# Altium PCB drive.PcbDoc
Units mm, origin at the board's own origin, x right, y up, seen from the top; angles counter-clockwise.
Board outline 29.7 x 29.02 mm, 2 copper layers (Top Layer, Bottom Layer); 60 components, 49 nets, 255 pads, 111 vias.
Unrouted connection lines stored in the file: 5.
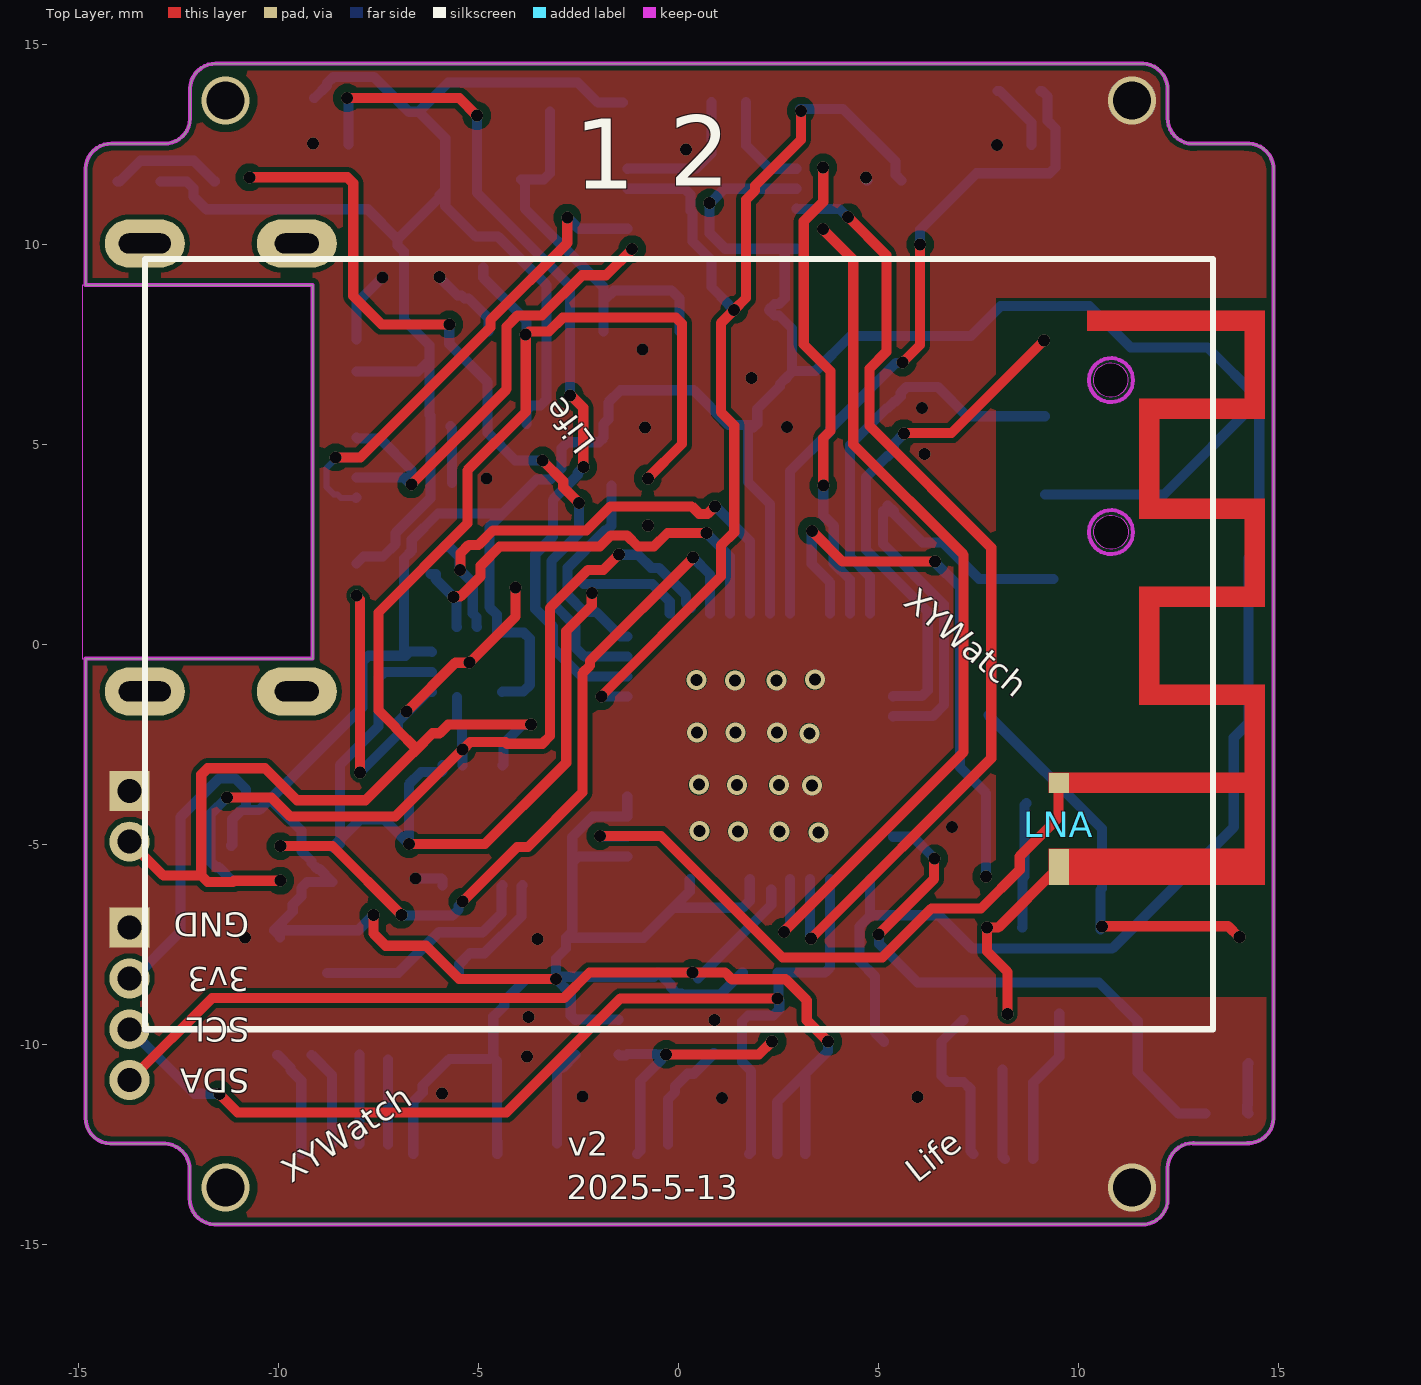
[diagram p0: Top Layer view]
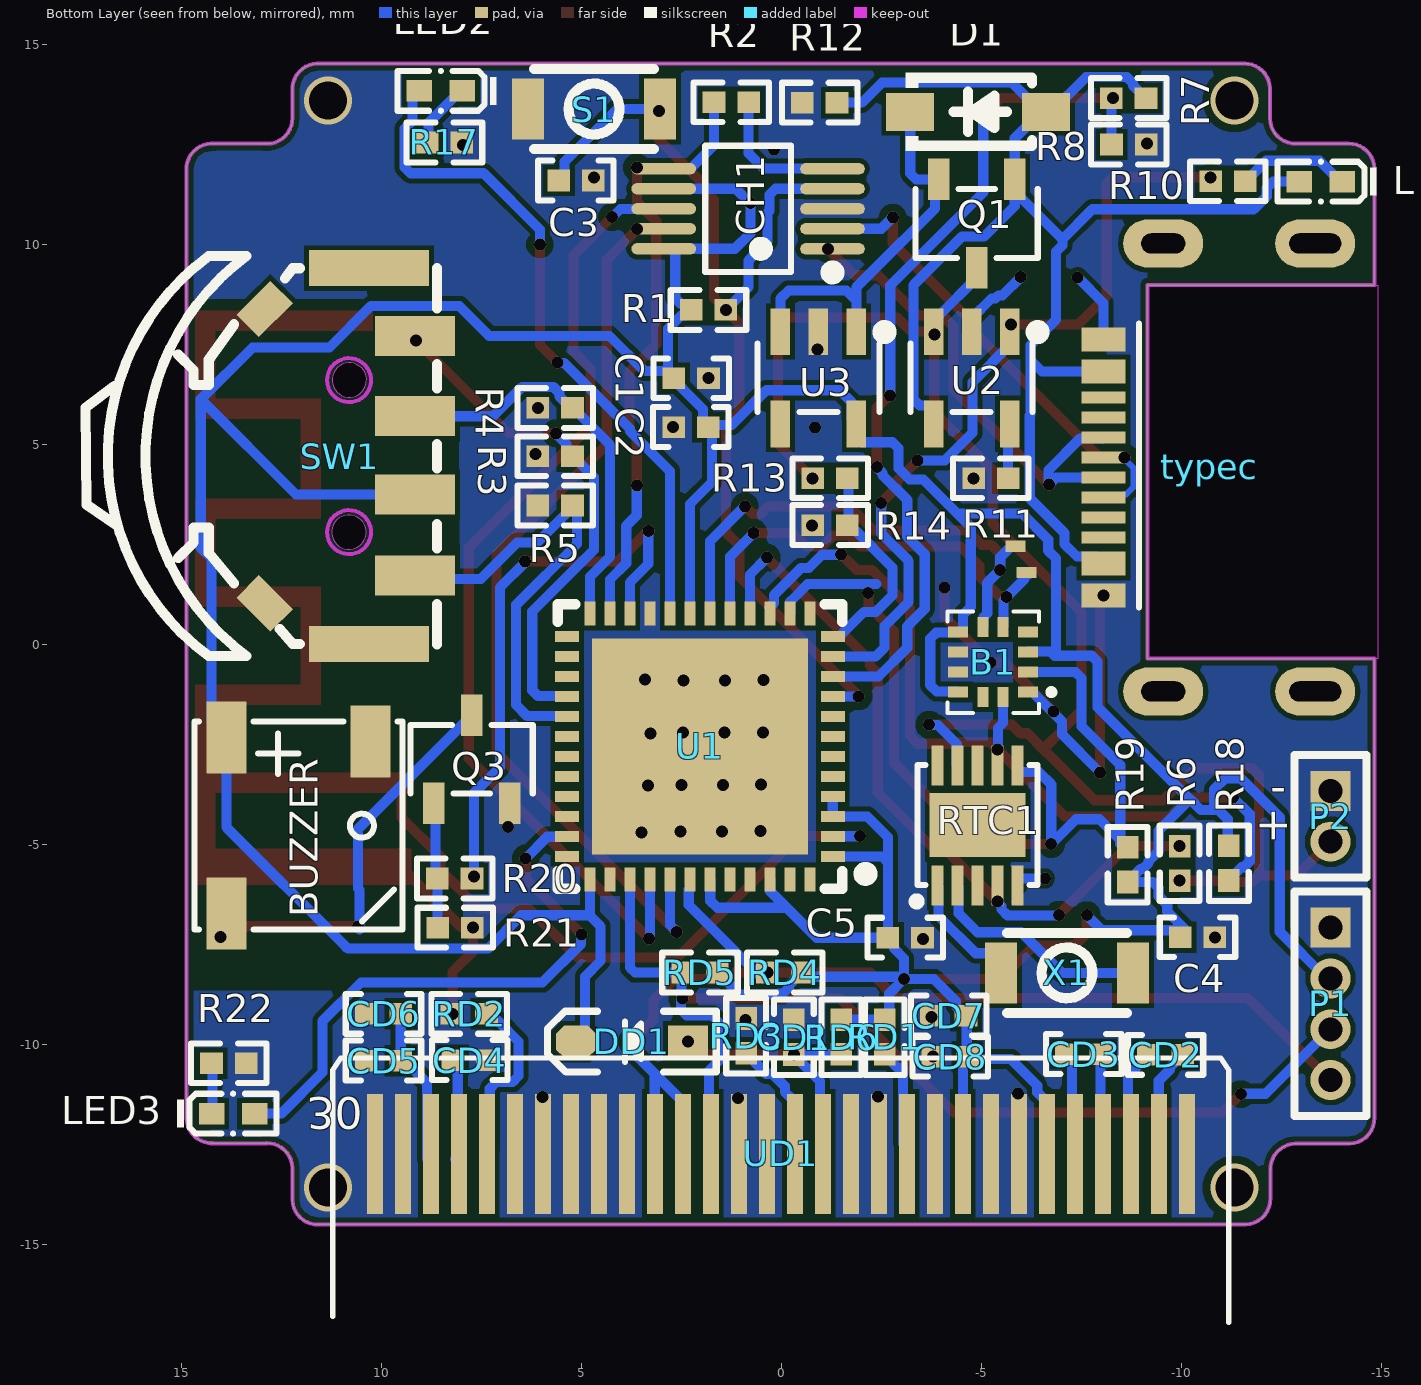
[diagram p1: Bottom Layer view, seen from below]

## Layer stack, top to bottom
Top Solder: solder mask 0.0102, Solder Resist, Dk 3.5
Top Layer: signal copper 0.0356
Dielectric 1: dielectric 0.32, FR-4, Dk 4.8
Bottom Layer: signal copper 0.0356
Bottom Solder: solder mask 0.0102, Solder Resist, Dk 3.5

## Board outline
-14.209,-12.491 -12.87,-12.49 -12.852,-12.492 cw(c-12.867,-13.127) -12.232,-13.142 -12.23,-13.13 -12.23,-13.89 -12.23,-13.859 ccw(c-11.595,-13.874) -11.61,-14.509 -11.61,-14.51 11.58,-14.51 11.571,-14.512 ccw(c11.586,-13.877) 12.221,-13.892 12.22,-13.87 12.22,-13.114 12.218,-13.098 cw(c12.853,-13.113) 12.868,-12.478 12.854,-12.48 14.253,-12.48 14.217,-12.478 ccw(c14.232,-11.843) 14.867,-11.858 14.869,-11.865 14.869,11.891 14.869,11.859 ccw(c14.234,11.874) 14.249,12.509 14.249,12.51 12.84,12.51 12.841,12.508 cw(c12.856,13.143) 12.221,13.158 12.22,13.13 12.22,13.88 12.219,13.859 ccw(c11.584,13.874) 11.599,14.509 11.59,14.51 -11.57,14.51 ccw(c-11.585,13.875) -12.22,13.89 -12.22,13.147 -12.219,13.132 cw(c-12.854,13.147) -12.869,12.512 -12.857,12.51 -14.18,12.51 ccw(c-14.195,11.875) -14.83,11.89 -14.829,11.861 -14.829,8.975 -9.155,8.975 -9.155,-0.365 -14.83,-0.365 -14.83,-11.848 -14.829,-11.841 ccw(c-14.194,-11.856)
cut-out: -14.913,8.975 -14.913,-0.365 -9.189,-0.365 -9.189,8.975

## Design rules (kind name [scope] priority, off if disabled: settings)
Clearance [All] p1: gap=0.127 ignorepadtopadclearanceinfootprint=FALSE except(0.15: Arc-Arc Arc-Track Track-Track; 0.2: Arc-Via Track-Via SMDPad-Via THPad-Via Via-Fill Via-Poly Via-Region; 0.4: Via-Via)
PolygonConnect [All] p1: connectstyle=Direct reliefconductorwidth=0.254 reliefentries=4 polygonreliefangle="90 Angle" airgapwidth=0.254
RoutingVias [All] p1: holewidth=0.4 width=1 viastyle="Through Hole" minholewidth=0.3 minwidth=0.6 maxholewidth=0.711 maxwidth=1.27
SolderMaskExpansion [All] p1: expansion=0.102 istentingtop=FALSE
Width [All] p1: maxlimit=3 minlimit=0.127 preferedwidth=0.254 minimp=50.000000 maximp=50.000000 favimp=50.000000
30 further rules are at their usual default settings.

## Components (designator, comment, footprint, x,y, rotation, side; value= is the part's Value field where it differs from the comment)
B1 "BMA423" LGA-12(2X2)-2 -5.41,-0.32 r90 bottom
BUZZER "Beep-5020" 5020BUZZER 12.07,-4.59 r0 bottom
C1 "104" C0402-MIN 2.199,6.645 r0 bottom
C2 "105" C0402-MIN 2.309,5.425 r180 bottom
C3 "104" C0402-MIN 5.08,11.59 r0 bottom (schematic designator CON)
C4 "104" C0402-MIN -10.46,-7.33 r0 bottom
C5 "104" C0402-MIN -3.152,-7.341 r0 bottom
CD1 "106" C0402-min -0.315,-9.879 r90 bottom
CD2 "105" C0402-min -9.66,-10.27 r0 bottom
CD3 "105" C0402-min -7.613,-10.25 r0 bottom
CD4 "225" C0402-min 7.73,-10.4 r0 bottom
CD5 "225" C0402-min 9.994,-10.414 r180 bottom
CD6 "105" C0402-min 9.994,-9.244 r180 bottom
CD7 "105" C0402-min -4.136,-9.29 r180 bottom
CD8 "225" C0402-min -4.175,-10.316 r180 bottom
CH1 "CH340X" MSOP-10 0.829,11.045 r90 bottom locked
D1 "MBR0530" SOD-123 -4.911,13.345 r180 bottom
DD1 "1N4148" SOD-323 3.732,-9.941 r0 bottom
LED1 "RED" LED0402 -13.65,11.56 r180 bottom
LED2 "RED" LED0402 8.35,13.83 r180 bottom
LED3 "BLUE" LED0402 13.86,-11.74 r0 bottom
LNA "ANTENNA" SWRA117D 12.47,-0.18 r270 top
P1 "MHDR1X4" MHDR1X4 -13.733,-7.09 r270 bottom
P2 "MHDR1X2" MHDR1X2 -13.733,-3.67 r270 bottom
Q1 "CJ2301" SOT-23-3 -5.051,10.545 r90 bottom
Q3 "SS8050" SOT-23-3 7.9,-2.91 r270 bottom
R1 "10K" R0402 1.869,8.355 r180 bottom
R2 "4.7K" R0402 1.299,13.545 r180 bottom
R3 "10K" R0402 5.599,4.695 r0 bottom
R4 "10K" R0402 5.599,5.905 r0 bottom
R5 "10K" R0402 5.599,3.465 r0 bottom
R6 "10K" R0402 -9.961,-5.535 r90 bottom
R7 "51K" R0402 -8.74,13.65 r0 bottom
R8 "100K" R0402 -8.64,12.49 r180 bottom
R10 "1K" R0402 -11.22,11.57 r0 bottom
R11 "10K" R0402 -5.191,4.145 r180 bottom
R12 "10K" R0402 -0.911,13.535 r180 bottom
R13 "100K" R0402 -1.275,4.145 r0 bottom
R14 "100K" R0402 -1.171,2.975 r180 bottom
R17 "1K" R0402 8.47,12.54 r180 bottom
R18 "4.7K" R0402 -11.19,-5.529 r90 bottom
R19 "4.7K" R0402 -8.661,-5.465 r270 bottom
R20 "1K" R0402 8.11,-5.86 r0 bottom
R21 "10K" R0402 8.1,-7.09 r0 bottom
R22 "1K" R0402 13.86,-10.48 r180 bottom
RD1 "4.7K" R0402 -2.589,-9.774 r270 bottom
RD2 "560K" R0402 7.853,-9.244 r180 bottom
RD3 "4.7K" R0402 0.874,-9.846 r90 bottom
RD4 "4.7K" R0402 -0.142,-8.212 r0 bottom
RD5 "4.7K" R0402 1.978,-8.212 r0 bottom
RD6 "4.7K" R0402 -1.505,-9.774 r270 bottom
RTC1 "PCF8563BS" HVSON-10-EP(3X3) -4.81,-4.757 r180 bottom
S1 "SW-PB" SWITCH-2X3 4.66,13.42 r0 bottom
SW1 "TM-2024A" LUNBO-min-out 12.268,4.5 r90 bottom locked
typec "typec-16p-new" TYPE-C-16P-NEW -11.648,4.542 r90 bottom
U1 "esp32-pico-d4" QFN-48-EP(7X7) 2.085,-2.57 r90 bottom
U2 "TP4054" SOT-23-5 -4.821,6.795 r0 bottom
U3 "ME6211C33M5G-N" SOT-23-5 -0.991,6.795 r0 bottom
UD1 "1.3寸OLED，FPC线30pin" 0.96OLED -16.489,-11.846 r0 top
X1 "32.768KHZ" SMD3215-2P -7.181,-8.195 r0 bottom locked

## Footprints (in the part's own frame and the unit in brackets; to place one, negate y for a bottom-side part, rotate by r counter-clockwise, add the part's x,y. Pads: shape width x height; smd on the part's side, far side on the other; paste and mask are expansions set on the pad)
0.96OLED [mm]
  rect 0.4x3 smd far side: 1(6.35,-0.9) 2(7.05,-0.9) 3(7.75,-0.9) 4(8.45,-0.9) 5(9.15,-0.9) 6(9.85,-0.9) 7(10.55,-0.9) 8(11.25,-0.9) 9(11.95,-0.9) 10(12.65,-0.9) 11(13.35,-0.9) 12(14.05,-0.9) 13(14.75,-0.9) 14(15.45,-0.9) 15(16.15,-0.9) 16(16.85,-0.9) 17(17.55,-0.9) 18(18.25,-0.9) 19(18.95,-0.9) 20(19.65,-0.9) 21(20.35,-0.9) 22(21.05,-0.9) 23(21.75,-0.9) 24(22.45,-0.9) 25(23.15,-0.9) 26(23.85,-0.9) 27(24.55,-0.9) 28(25.25,-0.9) 29(25.95,-0.9) 30(26.65,-0.9)
5020BUZZER [mm] "无源蜂鸣器"
  rect 1x1.8 smd: 1(1.8,-2.25) 2(1.8,2.152) 3(-1.8,-2.151)
  silkscreen extent -2.6,-2.65 2.6,2.55, body extent -2.6,-2.7 2.6,2.5, height 2
C0402-MIN [mm]
  rect 0.566x0.54 smd paste-100 mask+0.051: 1(-0.381,0) 2(0.485,0)
  silkscreen extent -0.89,-0.5 1,0.5
C0402-min [mm]
  rect 0.566x0.54 smd paste-100 mask+0.051: 1(-0.381,0) 2(0.485,0)
  silkscreen extent -0.89,-0.5 1,0.5
HVSON-10-EP(3X3) [mm] "PCF8563BS"
  rect 0.3x1 smd paste+0 mask+0.05: 1(-0.9,-1.273) 2(-0.4,-1.273) 3(0.1,-1.273) 4(0.6,-1.273) 5(1.1,-1.273) 6(1.1,1.727) 7(0.6,1.727) 8(0.1,1.727) 9(-0.4,1.727) 10(-0.9,1.727)
  rect 2.4x1.6 smd paste+0 mask+0.05: 11(0.1,0.227)
  silkscreen extent -1.52,-1.78 1.6,1.73
LED0402 [mm]
  rect 0.636x0.54 smd paste-100 mask+0.051: 1(-0.695,0) 2(0.381,0)
  silkscreen extent -1.24,-0.54 1.23,0.54
LGA-12(2X2)-2 [mm] "BMA423"
  rect 0.28x0.5 smd: 1(-0.881,-0.762) 2(-0.381,-0.762) 3(0.119,-0.762) 4(0.619,-0.762) 7(0.619,0.988) 8(0.119,0.988) 9(-0.381,0.988) 10(-0.881,0.988)
  rect 0.5x0.28 smd: 5(0.744,-0.137) 6(0.744,0.363) 11(-1.006,0.363) 12(-1.006,-0.137)
  silkscreen extent -1.4,-1.42 1.14,1.26
LUNBO-min-out [mm]
  rect 1x2 smd: 1(-2.788,-3.115) 2(3.197,-3.115) 3(-0.762,-3.115) 4(1.197,-3.115)
  rect 0.9x3 smd: 5(-4.503,-1.964) 6(4.897,-1.964)
  rect 1.2x0.8 smd rot 45: 7(-3.483,0.646)
  rect 1.2x0.8 smd rot 135: 8(3.877,0.646)
  Keep-Out Layer board cut-out: 2.529,-1.44 2.455,-1.23 2.286,-1.086 2.068,-1.045 1.858,-1.119 1.714,-1.288 1.673,-1.507 1.673,-1.507 1.747,-1.717 1.916,-1.861 2.135,-1.902 2.344,-1.827 2.489,-1.658 2.529,-1.44
  Keep-Out Layer board cut-out: -1.274,-1.43 -1.348,-1.22 -1.517,-1.076 -1.736,-1.035 -1.945,-1.109 -2.09,-1.278 -2.13,-1.497 -2.13,-1.497 -2.056,-1.706 -1.887,-1.851 -1.669,-1.891 -1.459,-1.817 -1.315,-1.648 -1.274,-1.43
  Keep-Out Layer circle w0.1: c-1.703,-1.464 r0.55
  Keep-Out Layer circle w0.1: c2.097,-1.464 r0.55
  Keep-Out Layer circle w0.025: c-1.703,-1.464 r0.55
  Keep-Out Layer circle w0.025: c2.097,-1.464 r0.55
  silkscreen extent -4.8,-3.66 5.2,5.12
MHDR1X2 [mm] "Connector; Header; 2 Position"
  rect 1x1 hole 0.6: 1(0,0)
  round 1 hole 0.6: 2(1.27,0)
  silkscreen extent -0.9,-0.9 2.17,0.9
MHDR1X4 [mm] "Connector; Header; 4 Position"
  rect 1x1 hole 0.6: 1(0,0)
  round 1 hole 0.6: 2(1.27,0) 3(2.54,0) 4(3.81,0)
  silkscreen extent -0.9,-0.9 4.71,0.9
MSOP-10 [mm] "CH340x"
  oval 0.28x1.62 smd: 1(-1.163,-2.111) 2(-0.662,-2.111) 3(-0.163,-2.111) 4(0.338,-2.111) 5(0.837,-2.111) 6(0.837,2.109) 7(0.338,2.109) 8(-0.163,2.109) 9(-0.662,2.109) 10(-1.163,2.109)
  silkscreen extent -1.9,-2.26 1.41,1.07
QFN-48-EP(7X7) [mm] "esp32-pico-d4"
  rect 0.27x0.6 smd paste-100 mask+0.051: 1(-2.74,-3.375) 2(-2.24,-3.375) 3(-1.74,-3.375) 4(-1.24,-3.375) 5(-0.74,-3.375) 6(-0.24,-3.375) 7(0.26,-3.375) 8(0.76,-3.375) 9(1.26,-3.375) 10(1.76,-3.375) 11(2.26,-3.375) 12(2.76,-3.375) 25(2.76,3.266) 26(2.26,3.266) 27(1.76,3.266) 28(1.26,3.266) 29(0.76,3.266) 30(0.26,3.266) 31(-0.24,3.266) 32(-0.74,3.266) 33(-1.24,3.266) 34(-1.74,3.266) 35(-2.24,3.266) 36(-2.74,3.266)
  rect 0.6x0.27 smd paste-100 mask+0.051: 13(3.33,-2.805) 14(3.33,-2.304) 15(3.33,-1.805) 16(3.33,-1.304) 17(3.33,-0.805) 18(3.33,-0.304) 19(3.33,0.195) 20(3.33,0.696) 21(3.33,1.195) 22(3.33,1.696) 23(3.33,2.195) 24(3.33,2.696) 37(-3.31,2.696) 38(-3.31,2.195) 39(-3.31,1.696) 40(-3.31,1.195) 41(-3.31,0.696) 42(-3.31,0.195) 43(-3.31,-0.304) 44(-3.31,-0.805) 45(-3.31,-1.304) 46(-3.31,-1.805) 47(-3.31,-2.304) 48(-3.31,-2.805)
  rect 5.4x5.4 smd paste-100 mask+0.051: 49(0.01,-0.054)
  silkscreen extent -3.55,-4.34 3.57,3.5
R0402 [mm]
  rect 0.566x0.54 smd paste-100 mask+0.051: 1(-0.381,0) 2(0.485,0)
  silkscreen extent -0.89,-0.5 1,0.5
SMD3215-2P [mm]
  rect 0.8x1.524 smd: 1(-1.613,0.026) 2(1.688,0.026)
  silkscreen extent -1.46,-0.97 1.54,1.03
SOD-123 [mm] "MBR0530"
  rect 1.2x0.95 smd: 1(-1.686,-0.039) 2(1.714,-0.039)
  silkscreen extent -1.79,-1.02 1.36,0.94
SOD-323 [mm] "1N4148"
  rect 1x0.8 smd: 1(-1.4,0)
  oct 1x0.8 smd: 2(1.4,0)
  silkscreen extent -2.11,-0.76 2.11,0.76, body extent -1.34,-0.63 1.31,0.67, height 1
SOT-23-3 [mm] "CJ2301 P-MOS, S8050 三极管"
  rect 1.037x0.532 smd: 1(1.07,-0.787) 2(1.07,1.113) 3(-1.132,0.163)
  silkscreen extent -0.89,-1.36 0.83,1.69
SOT-23-5 [mm] "TP4054,ME6211C33M5G-N"
  rect 0.49x1.157 smd: 1(-0.889,-1.016) 2(0.061,-1.016) 3(1.011,-1.016)
  rect 0.49x1.175 smd: 4(1.011,1.291) 5(-0.889,1.291)
  silkscreen extent -1.74,-1.16 1.59,0.99
SWITCH-2X3 [mm]
  rect 0.8x1.524 smd: 1(-1.632,0.044) 2(1.669,0.044)
  silkscreen extent -1.48,-0.96 1.52,1.04
SWRA117D [mm] "天线"
  rect 0.5x0.5 smd paste+0 mask+0.051: 1(3.288,-2.967)
  rect 0.9x0.5 smd paste+0 mask+0.051: 2(5.388,-2.967)
  Top Layer region: 3.538,1.683 3.538,-3.217 3.038,-3.217 3.038,1.683
  Top Layer region: 5.838,1.683 5.838,-3.217 4.938,-3.217 4.938,1.683
  Top Layer region: 5.838,2.183 5.838,1.683 0.838,1.683 0.838,2.183
  Top Layer region: 1.338,1.683 1.338,-0.957 0.838,-0.957 0.838,1.683
  Top Layer region: 0.838,-0.457 0.838,-0.957 -1.162,-0.957 -1.162,-0.457
  Top Layer region: -1.112,1.683 -1.112,-0.957 -1.612,-0.957 -1.612,1.683
  Top Layer region: -1.112,2.183 -1.112,1.683 -3.812,1.683 -3.812,2.183
  Top Layer region: -3.312,1.683 -3.312,-0.957 -3.812,-0.957 -3.812,1.683
  Top Layer region: -3.812,-0.457 -3.812,-0.957 -5.812,-0.957 -5.812,-0.457
  Top Layer region: -5.812,1.683 -5.812,-0.957 -6.312,-0.957 -6.312,1.683
  Top Layer region: -5.812,2.183 -5.812,1.683 -8.512,1.683 -8.512,2.183
  Top Layer region: -8.012,1.683 -8.012,-2.257 -8.512,-2.257 -8.512,1.683
TYPE-C-16P-NEW [mm]
  rect 0.6x1.1 smd paste-100 mask+0.05: 1(-3.327,3.59) 2(-2.527,3.59) 11(2.273,3.59) 12(3.073,3.59)
  rect 0.3x1.1 smd paste-100 mask+0.05: 3(-1.877,3.59) 4(-1.377,3.59) 5(-0.877,3.59) 6(-0.377,3.59) 7(0.123,3.59) 8(0.623,3.59) 9(1.123,3.59) 10(1.623,3.59)
  oval 1.2x2 hole 0.5 slot 1.1 at 90 deg: 13(-5.727,2.097) 14(5.473,2.097)
  oval 1.2x2 hole 0.5 slot 1.3 at 90 deg: 15(-5.727,-1.703) 16(5.473,-1.703)
  silkscreen extent -3.63,2.7 3.47,2.7, body extent -5.83,-3.5 5.57,3.05, height 1.59

## Part data
BUZZER: "贴片蜂鸣器5020最小封装"
C1 C2 C3 C4 C5 CD1 CD2 CD3 CD4 CD5 CD6 CD7 CD8: library part C, "无极性贴片电容", BOM名称=无极性贴片电容, 学习资源=www.ooocke.com, 版权归属=源创客
  C2 C3 C4 C5 CD1 CD2 CD3 CD4 CD5 CD6 CD7 CD8: 材质=X7R
D1: library part MBR0530T1G
DD1: "高速开关二极管", BOM名称=高速开关二极管, 学习资源=www.ooocke.com, 版权归属=源创客
LED1 LED2 LED3: library part LED-SMD, "贴片LED", BOM名称=贴片LED, 学习资源=www.ooocke.com, 版权归属=源创客
P1: "Header, 4-Pin", LatestRevisionDate=17-Jul-2002, LatestRevisionNote="Re-released for DXP Platform.", Publisher="Altium Limited"
P2: "Header, 2-Pin", LatestRevisionDate=17-Jul-2002, LatestRevisionNote="Re-released for DXP Platform.", Publisher="Altium Limited"
Q3: library part 8050-SMD, "高频放大-NPN型", BOM名称=高频放大-NPN型, 学习资源=www.ooocke.com, 属性="40V 1.5A 1W 100MHZ", 版权归属=源创客
R1 R2 R3 R4 R5 R6 R7 R8 R10 R11 R12 R13 R14 R17 R18 R19 R20 R21 R22 RD1 RD2 RD3 RD4 RD5 RD6: library part R, "贴片电阻", BOM名称=贴片电阻, 学习资源=www.ooocke.com, 版权归属=源创客
S1: "Switch", LatestRevisionDate=17-Jul-2002, LatestRevisionNote="Re-released for DXP Platform.", PackageDescription="Switch; 2 Leads", PackageReference=SPST-2, Published=24-Mar-1999, Publisher="Altium Limited"
SW1: library part lunbo-min, JLCPCB Part Class="Extended Part", LCSC Part Name=四脚两档拨轮开关TM-2024A, Manufacturer="XKB Connection(中国星坤)", Add into BOM=yes, Convert to PCB=yes, Datasheet=https://atta.szlcsc.com/upload/public/pdf/source/20211011/7A4DB3DC37E7D5823B6D92C66ED3191E.pdf, Device=TM-2024A, Manufacturer Part=TM-2024A, Supplier=LCSC, Supplier Footprint=SMD, Supplier Part=C561480, Symbol=TM-2024A
X1: library part XTAL-2P, "2脚无源脚晶振", BOM名称=2脚无源脚晶振, 学习资源=www.ooocke.com, 版权归属=源创客, 负载电容=CL20pF

## Free pads (board coordinates)
  rect 0.5x0.28 smd far side: 3(-6.13,1.79) 3(-5.861,2.445)

## Via types
v1: diameter 0.3, hole 0.3, Top Layer to Bottom Layer, 91 vias
v2: diameter 0.5, hole 0.3, Top Layer to Bottom Layer, 16 vias
v3: diameter 1.2, hole 0.95, Top Layer to Bottom Layer, 4 vias

## Nets (pads, with @x,y where several pads share a name; then routed paths per layer and width w, separated by ;. In a path a pad name is that pad's centre, name@x,y a point inside that pad or via, vN(x,y) a via of type N, cw(c..) or ccw(c..) an arc to the next point about the centre after c; other vN are vias at no path point)
+3.3V: B1.3 B1.7 B1.10 BUZZER.1 C1.2 C2.2 C4.2 C5.2 CD7.2 CD8.2 CH1.7 CH1.10 DD1.2 P1.2 R1.1 R18.2 R19.2 RD1.1 RD4.1 RD5.1 RD6.1 SW1.3 U1.1 U1.3 U1.4 U1.19 U1.37 U1.43 U1.46 U3.5 UD1.6 UD1.9 | length 140.8
  Top Layer w0.254: v1(-7.64,-6.78) -7.631,-6.789 -7.631,-7.24 -7.329,-7.542 -6.321,-7.542 -5.488,-8.375 v1(-3.072,-8.375)
  Bottom Layer w0.254: P1.2@-13.72,-8.36 -13.631,-8.36 -12.462,-7.191 -12.462,-4.328 -11.493,-3.359 -11.097,-3.359 -10.818,-3.638 -10.818,-4.152 ; R18.2 -11.165,-5.02 -11.165,-4.381 -10.937,-4.152 -10.494,-4.152 -10.226,-3.884 ; C4.2 -9.975,-7.298 -10.087,-7.186 C4.2@-10.118,-7.155 ; v1(-7.64,-6.78) -8.016,-7.155 C4.2@-10.118,-7.155 ; -6.873,-0.182 -6.873,2.139 -6.676,2.336 -6.676,2.612 -6.023,3.264 -4.438,3.264 ; UD1.6 -6.639,-11.446 -6.402,-11.209 -6.402,-11.038 -5.738,-10.374 -4.718,-10.374 CD8.2 ; B1.3 -6.185,-0.188 -6.395,-0.188 -6.73,-0.188 -6.832,-0.291 -7.762,-0.291 -7.911,-0.439 -7.911,-1.579 -10.216,-3.884 -10.226,-3.884 ; -4.737,2.904 -4.737,0.923 -4.545,0.731 -4.545,0.312 -4.532,0.299 B1.7 -4.409,0.286 -3.875,0.286 -3.726,0.137 -3.726,-1.026 -3.888,-1.188 -4.409,-1.188 B1.10 ; -4.737,2.929 -4.42,3.246 -3.553,4.113 -3.212,4.113 -2.933,4.392 -2.933,4.894 -2.784,5.043 -1.998,5.043 -1.88,5.161 U3.5 -1.762,5.622 -1.762,6.041 -1.458,6.345 0.37,6.345 1.238,5.477 1.783,5.477 1.729,5.423 1.729,4.051 2.28,3.5 U1.19 ; C5.2@-2.722,-7.241 -2.823,-7.342 -2.823,-7.612 -3.072,-7.861 v1(-3.072,-8.375) ; C5.2 -2.667,-5.459 ; C5.2@-2.627,-7.341 -0.886,-7.341 -0.14,-6.594 ; RD1.1 -2.703,-9.279 -2.703,-8.744 v1(-3.072,-8.375) ; RD1.1@-2.589,-9.39 -1.507,-9.39 RD6.1 ; U1.1 -2.518,-5.31 -2.667,-5.459 ; U1.4 U1.3 -2.155,-4.31 -2.667,-4.822 -2.667,-5.459 ; RD4.1 -0.626,-8.316 -3,-8.316 -3.059,-8.375 v1(-3.072,-8.375) ; RD4.1@-0.47,-8.252 RD4.1@-0.419,-8.302 ; RD4.1@-0.343,-8.355 -0.367,-8.355 -0.194,-8.528 -0.194,-8.587 -0.045,-8.736 ; U1.46 0.272,-5.888 0.272,-6.182 -0.14,-6.594 ; RD5.1 1.585,-8.212 1.036,-8.76 0.089,-8.76 ; U1.43 1.772,-5.888 1.772,-6.416 1.594,-6.594 -0.14,-6.594 ; C2.2@1.865,5.416 1.958,5.509 1.958,5.874 2.205,6.121 ; 2.206,6.121 2.354,6.27 ; 2.354,6.27 2.527,6.443 2.527,6.502 C1.2@2.667,6.641 ; C1.2 2.671,6.645 C1.2@2.667,6.641 ; C1.2@2.827,6.801 C1.2@2.667,6.641 ; CH1.10 CH1.10@2.66,9.882 ; CH1.7 1.135,11.382 0.781,11.028 v1(0.768,11.028) 0.768,10.271 1.157,9.882 CH1.10@2.66,9.882 ; 4.78,-6.795 4.516,-7.059 4.516,-7.454 4.516,-7.924 4.906,-8.314 4.906,-9.715 DD1.2 ; U1.37 4.78,-6.7 4.86,-6.78 6.497,-6.78 7.331,-7.614 10.832,-7.614 10.981,-7.465 13.87,-4.576 BUZZER.1 14.244,-1.967 14.244,2.143 14.51,2.41 14.51,6.12 ; SW1.3 9.511,3.738 9.513,3.74 12.13,3.74 14.51,6.12 ; -10.226,-3.884 -10.216,-3.883 -9.437,-4.662 -9.437,-5.174 -9.185,-5.426 -9.185,-5.472 -9.037,-5.621 -8.99,-5.621 R19.2 -9.289,-5.95 -9.437,-6.099 -9.437,-6.304 -9.651,-6.518 -9.651,-6.688 C4.2@-10.118,-7.155 ; CD8.2 -4.641,-10.296 -4.641,-9.309 CD7.2 -4.608,-9.29 -4.366,-9.047 -4.366,-8.925 -3.816,-8.375 v1(-3.072,-8.375) ; CD8.2 -4.546,-10.43 -4.546,-12.437 UD1.9@-4.539,-12.444 ; UD1.9@-4.539,-12.444 UD1.9 UD1.9@-4.539,-12.444 ; -0.045,-8.736 0.065,-8.736 0.089,-8.76 ; -0.045,-8.736 -0.021,-8.76 0.089,-8.76 ; CH1.10@2.66,9.882 2.648,9.87 2.648,8.647 2.499,8.498 2.393,8.498 R1.1 2.393,8.212 2.502,8.212 2.827,7.887 2.827,6.83 3.421,6.83 4.29,7.7 7.297,7.7 8.048,8.451 10.259,8.451 11.294,7.416 13.214,7.416 14.51,6.12
+5: D1.2 LED1.1 Q1.1 R7.1 R12.2 typec.2 typec.11 U2.4 | length 38.4
  Bottom Layer w0.254: LED1.1 -12.297,11.56 -12.138,11.401 -12.138,11.195 -11.812,10.869 -7.779,10.869 -7.032,10.122 ; R7.1 -9.108,13.65 -8.792,13.966 -8.792,14.025 -8.643,14.174 -7.618,14.174 -6.75,13.306 D1.2 D1.2@-6.5,13.306 ; typec.2 -7.885,2.188 -7.395,2.188 -7.08,2.503 -7.08,2.779 -6.213,3.646 -6.213,5.713 -6.232,5.733 -6.232,7.102 ; typec.11 -6.519,6.815 -6.232,7.102 ; U2.4 -3.81,5.846 -3.692,5.964 -3.46,5.964 -3.311,6.113 -3.311,8.98 -4.517,10.185 -5.072,10.185 -5.838,10.952 Q1.1@-5.838,11.316 ; R12.2 -2.02,13.535 -2.371,13.886 -2.52,14.035 -5.771,14.035 D1.2@-6.5,13.306 ; -7.032,10.122 -7.032,9.971 -6.87,9.809 -6.87,8.11 -6.232,7.472 -6.232,7.102 ; -7.032,10.122 -5.977,11.177 -5.977,11.224 -5.885,11.316 Q1.1@-5.838,11.316 ; D1.2@-6.5,13.306 -5.838,12.644 Q1.1 Q1.1@-5.838,11.316
ACC_INT_1: B1.5 pad.3@-6.13,1.79 U1.17 | length 11.2
  Top Layer w0.254: v1(-5.63,1.176) -5.617,1.176 -5.599,1.195 -5.455,1.195 -4.956,1.694 -4.956,1.958 -4.478,2.437 -1.978,2.437 -1.698,2.717 -1.302,2.717 -1.022,2.437 -0.624,2.437 -0.284,2.777 v1(0.689,2.777)
  Bottom Layer w0.254: pad.3@-6.207,1.753 -6.083,1.753 -6.077,1.747 -6.077,1.623 v1@-5.639,1.185 ; v1@-5.621,1.155 -5.557,1.091 -5.557,0.434 B1.5 ; v1@0.704,2.762 1.28,2.186 U1.17
ACC_INT_2: B1.6 pad.3@-5.861,2.445 U1.18 | length 12.9
  Top Layer w0.254: v1(-5.467,1.857) -5.458,1.866 -5.458,2.271 -5.249,2.48 -5.006,2.48 -4.645,2.841 -2.309,2.841 -1.708,3.442 0.32,3.442 0.508,3.254 0.719,3.254 v1(0.907,3.442)
  Bottom Layer w0.254: pad.3@-5.861,2.445 -5.848,2.432 -5.738,2.432 -5.476,2.17 -5.476,1.866 v1(-5.467,1.857) -5.467,1.845 -5.153,1.53 -5.153,0.767 -5.06,0.674 -5.06,0.437 B1.6 ; v1(0.907,3.442) 1.78,2.569 U1.18
ADC: R13.1 R14.2 U1.12 | length 5.1
  Bottom Layer w0.254: R14.2@-1.689,2.955 -1.812,2.832 -1.861,2.832 -2.782,1.911 -2.782,1.217 -2.368,0.803 -2.068,0.803 -1.455,0.19 U1.12 ; R14.2@-1.686,2.955 R13.1@-1.686,3.957
beep: R20.1 U1.22 | length 14.1
  Top Layer w0.254: v1(3.323,2.83) 4.093,2.06 v1(6.4,2.06)
  Bottom Layer w0.254: v1(3.323,2.83) 3.323,1.999 3.78,1.542 U1.22 ; v1(6.4,2.06) 6.4,2.048 7.03,1.418 7.03,-3.079 7.683,-3.732 v1(7.683,-5.809)
CHARGE_STAT: R10.2 U1.11 U2.1 | length 19.9
  Top Layer w0.254: v1(-10.734,11.669) -8.289,11.669 -8.14,11.52 -8.14,8.7 -7.43,7.99 v1(-5.74,7.99) ; v1(-3.41,4.59) -2.89,4.07 -2.89,3.92 v1(-2.5,3.53)
  Bottom Layer w0.254: v1(-5.74,7.99) -5.74,7.507 -4.781,6.548 -4.781,5.281 -4.09,4.59 v1(-3.41,4.59) ; v1(-2.5,3.53) -2.5,2.764 -3.186,2.078 -3.186,1.05 -2.583,0.447 -2.583,-0.089 -2.361,-0.31 U1.11
EN: C3.2 CH1.4 R1.2 S1.1 U1.9 | length 26.1
  Top Layer w0.254: v1(-1.935,-1.31) -1.935,-1.298 1.05,1.688 1.05,2.463 1.384,2.797 1.384,5.466 1.05,5.8 1.05,8.021 v1(1.384,8.355) 1.678,8.649 1.678,11.108 1.905,11.335 1.905,11.457 2.948,12.5 3.05,12.602 v1(3.05,13.33)
  Bottom Layer w0.254: v1(-1.935,-1.31) U1.9 ; CH1.4 0.143,11.382 0.291,11.234 0.291,10.831 0.34,10.782 0.34,10.067 0.814,9.592 0.814,8.924 1.228,8.511 1.228,8.498 1.371,8.355 v1(1.384,8.355) ; S1.1 4.104,13.376 5.419,12.061 5.419,11.733 5.562,11.59 C3.2
GND: B1.1 B1.8 B1.9 C1.1 C2.1 C3.1 C4.1 C5.1 CD1.2 CD4.1 CD5.1 CD6.1 CD7.1 CD8.1 CH1.3 LNA.2 P1.1 P2.1 Q3.2 R3.2 R4.2 R5.2 R8.2 R11.1 R12.1 R14.1 R17.2 R21.1 R22.2 RD2.1 RD3.2 RTC1.5 S1.2 typec.1 typec.12 U1.21 U1.49 U2.2 U3.2 UD1.1 UD1.7 UD1.8 UD1.10 UD1.12 UD1.13 UD1.16 UD1.17 UD1.21 UD1.22 UD1.23 UD1.24 UD1.25 UD1.29 UD1.30 | length 21.5
  Top Layer w0.254: v1(-8.058,1.215) -8.058,1.203 -7.97,1.115 v1(-7.97,-3.21) ; v1(-6.803,-1.684) -5.588,-0.469 -5.239,-0.469 v1(-5.23,-0.46) -4.08,0.69 v1(-4.08,1.42) ; v2@0.426,-0.903 0.439,-0.89 v2@0.449,-0.9 ; v2@0.451,-2.213 0.459,-2.22 v2@0.469,-2.21 ; v2@0.491,-3.523 0.499,-3.53 v2@0.509,-3.52 ; v2@0.511,-4.683 0.519,-4.69 v2@0.529,-4.68 ; v2@1.389,-0.9 1.399,-0.89 v2@1.414,-0.905 ; v2@1.409,-2.21 1.419,-2.22 v2@1.424,-2.215 ; v2@1.449,-3.52 1.459,-3.53 v2@1.464,-3.525 ; v2@1.469,-4.68 1.479,-4.69 v2@1.484,-4.685 ; v2@2.423,-0.905 2.438,-0.89 v2@2.445,-0.898 ; v2@2.453,-2.215 v2@2.46,-2.223 ; v2@2.493,-3.525 2.498,-3.53 v2@2.5,-3.528 ; v2@2.513,-4.685 v2@2.525,-4.698 ; v2@3.263,-2.223 v2(3.27,-2.23) ; v2@3.328,-3.528 v2(3.33,-3.53) ; v2@3.392,-0.898 v2(3.4,-0.89) ; v2@3.478,-4.698 v2(3.49,-4.71) ; v1(8.217,-9.243) 8.217,-8.195 7.702,-7.68 v1(7.702,-7.088) 7.982,-7.088 LNA.2
  Bottom Layer w0.254: typec.12 -8.058,8.522 v1(-7.41,9.17) ; v1(-7.97,-3.21) -7.023,-2.263 -7.023,-1.942 -6.282,-1.201 B1.1 ; v1(-6.59,-5.86) -5.933,-5.86 -5.91,-5.883 RTC1.5 ; v1(-5.988,9.173) -5.528,8.713 -5.43,8.713 -5.357,8.64 -5.256,8.64 -4.76,8.144 U2.2 ; C3.1 C3.1@4.712,11.59
  other v1: 1.074,-11.345 5.964,-11.325 -2.415,-11.306 -5.925,-11.236 -3.794,-10.316 0.889,-9.394 -3.755,-9.329 -3.539,-7.37 -10.841,-7.33 6.827,-4.571 -0.77,2.965 -4.81,4.145 6.141,4.753 -0.841,5.419 2.706,5.421 6.083,5.905 1.82,6.65 -0.91,7.37 4.675,11.659 0.18,12.37 7.949,12.481 -9.149,12.511
  other v2: 0.519,-4.675 1.479,-4.685 2.518,-4.685 1.459,-3.525 2.498,-3.525 0.499,-3.515 0.459,-2.205 1.419,-2.215 2.458,-2.215 0.439,-0.895 1.399,-0.905 2.438,-0.905
  other v3: 11.33,-13.59 11.33,13.59
IO0: CH1.6 R2.1 U1.23 | length 14.6
  Top Layer w0.254: v1(3.609,11.915) 3.609,11.055 3.124,10.57 3.124,7.489 3.791,6.822 3.791,5.333 3.61,5.152 v1(3.61,3.96)
  Bottom Layer w0.254: R2.1 1.68,12.47 2.268,11.882 CH1.6 ; CH1.6@3.609,11.927 v1(3.609,11.915) CH1.6@3.617,11.924 ; v1(3.61,3.96) 3.61,3.217 3.873,2.955 3.873,2.021 4.28,1.614 U1.23 ; CH1.6@3.617,11.919 CH1.6@3.621,11.915
IO13: LED2.1 U1.20 | length 17.2
  Top Layer w0.254: v1(5.592,7.038) 6.03,7.476 v1(6.03,9.99)
  Bottom Layer w0.254: U1.20 2.78,4.322 3.781,5.323 3.781,5.381 5.43,7.029 5.584,7.029 v1(5.592,7.038) ; v1(6.03,9.99) 6.03,10.36 7.44,11.77 9.267,11.77 9.416,11.919 9.416,12.887 9.219,13.084 9.219,13.687 9.076,13.83 LED2.1
IO18: LED3.1 U1.35 | length 14.7
  Top Layer w0.254: v1(4.993,-7.257) 6.381,-5.869 6.381,-5.369 v1(6.39,-5.36)
  Bottom Layer w0.254: v1(4.993,-7.257) 5.002,-7.265 5.002,-7.494 5.969,-8.461 10.503,-8.461 11.471,-9.428 11.471,-10.712 12.499,-11.74 LED3.1 ; U1.35 5.358,-4.818 5.848,-4.818 v1(6.39,-5.36)
IO19: U1.38
IO23: U1.36
LNA_IN: LNA.1 U1.2 | length 15.9
  Top Layer w0.254: v1(-1.97,-4.8) -0.445,-4.8 2.592,-7.837 5.088,-7.837 6.313,-6.611 7.555,-6.611 8.523,-5.643 8.523,-5.308 9.491,-4.34 9.491,-3.479 LNA.1
  Bottom Layer w0.254: v1(-1.97,-4.8) -1.965,-4.805 -1.295,-4.805 U1.2
MCU_RXD: CH1.8 U1.40 | length 24.6
  Top Layer w0.254: v1(3.303,-7.36) 7.81,-2.853 7.81,2.41 4.766,5.454 4.766,6.886 5.188,7.309 5.188,9.719 v1(4.232,10.676)
  Bottom Layer w0.254: CH1.8 2.943,10.877 4.018,10.877 4.219,10.676 v1(4.232,10.676) ; U1.40 3.28,-7.324 3.303,-7.348 v1(3.303,-7.36)
MCU_TXD: CH1.9 U1.41 | length 22.3
  Top Layer w0.254: v1(2.623,-7.194) 7.12,-2.697 7.12,2.23 4.362,4.988 4.362,9.612 v1(3.601,10.372)
  Bottom Layer w0.254: v1(2.623,-7.194) 2.623,-7.181 2.78,-7.024 U1.41
NetBUZZER_2: BUZZER.2 Q3.3 | length 10.1
  Top Layer w0.254: v1(10.585,-7.056) 13.732,-7.056 14.002,-7.326 v1(14.015,-7.326)
  Bottom Layer w0.254: Q3.3 10.577,-4.618 10.577,-6.113 10.54,-6.15 v1@10.54,-7.14
NetCD1_1: CD1.1 DD1.1 RD6.2 UD1.14 | length 6.7
  Top Layer w0.254: v1(-0.315,-10.26) 2,-10.26 2.32,-9.941 v1(2.332,-9.941)
  Bottom Layer w0.254: RD6.2 -1.479,-10.284 -1.326,-10.284 -1.287,-10.245 -0.585,-10.245 -0.57,-10.26 v1(-0.315,-10.26) ; UD1.14 -0.966,-12.673 -0.966,-10.924 -0.446,-10.404 CD1.1@-0.446,-10.26
NetCD2_1: CD2.1 UD1.2 | length 2.7
  Bottom Layer w0.254: CD2.1 -10.028,-10.27 -9.712,-10.586 -9.712,-10.645 -9.439,-10.918 UD1.2
NetCD2_2: CD2.2 UD1.3 | length 2.5
  Bottom Layer w0.254: CD2.2@-9.18,-10.27 -8.673,-10.777 UD1.3@-8.673,-12.51
NetCD3_1: CD3.1 UD1.4 | length 2.2
  Bottom Layer w0.254: UD1.4@-7.983,-12.5 CD3.1@-7.983,-10.261
NetCD3_2: CD3.2 UD1.5 | length 2.1
  Bottom Layer w0.254: UD1.5@-7.273,-12.51 CD3.2@-7.273,-10.393
NetCD4_2: CD4.2 UD1.27 | length 2.3
  Bottom Layer w0.254: CD4.2@8.088,-10.644 8.088,-12.808 UD1.27@8.151,-12.871
NetCD5_2: CD5.2 CD6.2 UD1.28 | length 3.9
  Bottom Layer w0.254: UD1.28@8.851,-12.871 8.858,-12.863 8.858,-10.969 9.509,-10.318 CD6.2
NetCH1_5: CH1.5 R2.2 | length 3.5
  Bottom Layer w0.254: CH1.5 -1.277,11.887 0.437,11.887 0.814,12.264 R2.2
NetD1_1: D1.1 Q1.2 U3.1 U3.3 | length 9.8
  Bottom Layer w0.254: D1.1 -3.225,11.764 -3.374,11.615 Q1.2 -3.849,11.526 -3.849,10.889 -2.267,9.307 -1.88,8.92 -1.88,8.622 -1.88,8.144 U3.1 ; -1.845,8.622 -1.631,8.835 -0.181,8.835 0.02,8.634 U3.3
NetLED1_2: LED1.2 R10.1 | length 2.9
  Bottom Layer w0.254: LED1.2 -13.983,11.56 -13.459,12.084 -12.128,12.084 -11.614,11.57 R10.1
NetLED2_2: LED2.2 R17.1 | length 1.7
  Bottom Layer w0.254: LED2.2 8.017,13.83 8.815,13.032 R17.1@8.815,12.481
NetLED3_2: LED3.2 R22.1 | length 1.3
  Bottom Layer w0.254: LED3.2 14.211,-11.71 14.211,-11.53 14.221,-11.52 14.221,-10.5 R22.1
NetQ3_1: Q3.1 R20.2 R21.2 | length 3.2
  Bottom Layer w0.254: R21.2 8.59,-7.085 8.59,-5.865 8.641,-5.814 8.641,-4.027 Q3.1
NetR11_2: R11.2 U2.5 | length 1.4
  Bottom Layer w0.254: U2.5@-5.71,5.444 -5.668,5.402 R11.2@-5.668,4.025
NetRD1_2: RD1.2 UD1.11 | length 2.5
  Bottom Layer w0.254: UD1.11@-3.048,-12.485 -3.048,-10.601 -2.919,-10.601 -2.589,-10.271 RD1.2
NetRD2_2: RD2.2 UD1.26 | length 4.1
  Bottom Layer w0.254: RD2.2@7.109,-9.404 7.097,-9.404 6.566,-9.935 6.566,-10.8 6.715,-10.948 7.117,-10.948 7.288,-11.119 7.288,-12.673 UD1.26
NetRD3_1: RD3.1 UD1.15 | length 2.8
  Bottom Layer w0.254: UD1.15@-0.273,-12.51 -0.273,-11.38 -0.093,-11.2 -0.093,-11.056 0.221,-10.742 0.372,-10.742 0.874,-10.24 RD3.1
NetRTC1_1: RTC1.1 X1.2 | length 3.1
  Bottom Layer w0.254: X1.2 -5.494,-8.005 -5.221,-7.732 -4.861,-7.732 -3.933,-6.804 -3.933,-6.053 RTC1.1
NetRTC1_2: RTC1.2 X1.1 | length 5.7
  Bottom Layer w0.254: X1.1 -7.015,-8.221 -5.999,-7.205 -4.906,-7.205 -4.433,-6.732 -4.433,-6.053 RTC1.2
RTC_INT: R6.2 RTC1.4 U1.16 | length 18.2
  Top Layer w0.254: v1(-9.961,-5.05) -8.66,-5.05 v1(-6.94,-6.77) ; v1(-5.41,-6.44) -4.042,-5.072 -3.772,-5.072 -2.412,-3.712 -2.412,-0.732 -2.22,-0.54 -2.22,-0.42 v1(0.359,2.159)
  Bottom Layer w0.254: v1(-6.94,-6.77) -6.928,-6.77 -6.914,-6.784 -5.655,-6.784 -5.506,-6.635 -5.506,-6.548 -5.41,-6.452 v1(-5.41,-6.44) ; v1(0.359,2.159) 0.78,1.738 U1.16
SCL1: B1.12 R18.1 RTC1.7 U1.15 | length 21.3
  Top Layer w0.254: v1(-11.295,-3.836) -10.186,-3.836 -9.712,-4.31 -7.09,-4.31 v1(-5.41,-2.63) ; v1@-5.394,-2.626 -5.216,-2.448 -4.342,-2.448 -4.299,-2.491 -3.411,-2.491 -3.22,-2.3 -3.22,0.904 -2.27,1.854 -1.886,1.854 v1(-1.5,2.24)
  Bottom Layer w0.254: v1(-11.295,-3.836) -11.714,-4.255 -11.714,-5.432 -11.565,-5.581 -11.506,-5.581 -11.19,-5.897 R18.1 ; B1.12 -5.547,-1.972 -5.419,-2.1 -5.419,-2.621 v1(-5.41,-2.63) RTC1.7 ; v1(-1.5,2.24) -1.491,2.231 -1.021,2.231 -0.694,1.904 -0.498,1.904 0.176,1.229 0.176,1.034 U1.15@0.307,0.903
SCL_OLED: P1.3 RD5.2 U1.39 UD1.18 | length 27.2
  Top Layer w0.254: v1(-11.49,-11.25) -11.027,-11.713 -4.313,-11.713 -1.458,-8.858 v1@2.464,-8.858
  Bottom Layer w0.254: P1.3@-13.72,-9.63 -12.109,-11.241 -11.499,-11.241 v1(-11.49,-11.25) ; UD1.18 1.802,-12.705 1.802,-10.67 1.578,-10.446 1.578,-9.436 1.727,-9.287 2.36,-9.287 2.509,-9.138 2.509,-8.908 2.472,-8.871 v1(2.472,-8.858) ; RD5.2 2.518,-8.212 3.657,-8.212 3.78,-8.089 U1.39 ; v1@2.491,-8.858 2.491,-8.355 2.518,-8.327 RD5.2@2.518,-8.272
SDA1: B1.2 R19.1 RTC1.6 U1.14 | length 22.9
  Top Layer w0.254: v1(-6.75,-5) -4.85,-5 -2.978,-3.128 -2.816,-2.966 -2.816,0.325 -2.179,0.963 -2.179,1.271 v1(-2.17,1.28)
  Bottom Layer w0.254: R19.1 -8.526,-4.949 -7.957,-4.38 -7.37,-4.38 v1(-6.75,-5) -6.75,-3.509 -6.441,-3.2 -5.933,-3.2 -5.91,-3.177 RTC1.6 ; R19.1@-8.475,-5 -8.475,-3.025 -7.507,-2.057 -7.507,-0.85 -7.358,-0.701 B1.2 ; -2.378,1.5 -0.666,1.5 -0.331,1.165 -0.228,1.062 -0.228,0.768 U1.14
SDA_OLED: P1.4 RD4.2 U1.42 UD1.19 UD1.20 | length 27.9
  Top Layer w0.254: P1.4@-13.72,-10.9 -11.672,-8.852 -2.874,-8.852 -2.234,-8.212 1.156,-8.212 1.325,-8.381 2.67,-8.381 3.196,-8.908 3.196,-9.405 v1(3.732,-9.941)
  Bottom Layer w0.254: RD4.2@0.478,-8.356 2.31,-6.525 U1.42@2.31,-6.14 ; UD1.19 2.461,-11.446 3.161,-10.746 ; UD1.20 3.161,-10.746 ; v1(3.732,-9.941) 3.728,-9.945 3.728,-10.179 3.161,-10.746
  other v1: 0.343,-8.212
SW1: R3.1 SW1.2 U1.28 | length 12.9
  Top Layer w0.254: v1(5.626,5.268) 5.635,5.277 6.817,5.277 v1(9.13,7.59) v1@9.142,7.59
  Bottom Layer w0.254: R3.1 5.205,4.695 4.681,4.171 4.681,2.355 6.222,0.814 6.222,-1.153 6.073,-1.302 5.358,-1.302 U1.28 ; R3.1@5.23,4.695 5.373,4.838 5.373,5.003 5.626,5.256 v1(5.626,5.268)
SW2: R4.1 SW1.4 U1.24 | length 10.3
  Bottom Layer w0.254: U1.24 4.78,1.685 4.277,2.188 4.277,4.977 5.205,5.905 R4.1@5.23,5.905 ; R4.1 R4.1@5.23,5.905 ; SW1.4 7.203,5.697 6.471,6.429 5.695,6.429 5.546,6.28 5.546,6.197 5.398,6.048 5.373,6.048 R4.1@5.23,5.905
SW3: R5.1 SW1.1 U1.29 | length 12.1
  Bottom Layer w0.254: R5.1 5.23,3.465 R5.1@5.373,3.322 ; U1.29 5.358,-1.802 6.348,-1.802 6.626,-1.524 6.626,0.982 5.107,2.501 5.107,3.322 R5.1@5.373,3.322 ; SW1.1@9.359,1.63 7.505,1.63 6.598,2.537 6.099,2.537 5.373,3.263 R5.1@5.373,3.322
USB+: CH1.1 typec.6 typec.8 | length 12.4
  Top Layer w0.254: v1(-6.69,3.99) -4.305,6.374 -4.305,7.753 -4.305,7.937 -4.026,8.216 -3.42,8.216 -2.418,9.219 -1.823,9.219 v1(-1.169,9.873)
  Bottom Layer w0.254: typec.6 -6.878,4.165 -6.702,3.99 v1(-6.69,3.99) ; typec.8@-8.055,5.163 -8.035,5.142 -7.476,5.142 -6.687,4.353 -6.687,4.011 -6.674,3.998 v1@-6.669,3.998
USB-: CH1.2 typec.5 typec.7 | length 12.6
  Top Layer w0.254: v1(-8.58,4.665) -7.964,4.665 -4.709,7.92 -4.709,8.104 -2.79,10.024 v1(-2.79,10.66)
  Bottom Layer w0.154: v1(-8.58,4.665) -8.58,4.632 -8.812,4.4 -8.812,3.931 -8.692,3.811 -8.626,3.745 -8.621,3.745 -8.614,3.738 -8.531,3.738 -8.443,3.65 typec.5@-8.073,3.65
  Bottom Layer w0.254: typec.7@-8.601,4.665 typec.7 ; typec.5@-8.073,3.65 typec.5 ; v1(-2.79,10.66) -2.778,10.66 -2.5,10.382 CH1.2
USB_DET: R7.2 R8.1 U1.10 | length 21.8
  Top Layer w0.254: v1(-8.292,13.652) -5.492,13.652 v1(-5.05,13.21) ; v1@-2.69,6.21 -2.39,5.91 v1(-2.39,4.43)
  Bottom Layer w0.254: R8.1 -8.257,12.492 -8.257,13.648 R7.2 ; v1(-5.05,13.21) -5.05,11.289 -2.725,8.964 v1(-2.725,6.214) ; v1(-2.39,4.43) -2.39,4.418 -2.529,4.279 -2.529,4.225 -3.15,3.604 -3.15,2.685 -3.59,2.246 -3.59,0.882 -3.15,0.443 -3.15,-0.093 -2.433,-0.81 U1.10
Vbat+: P2.2 Q1.3 R6.1 R13.2 RTC1.9 U2.3 | length 40.3
  Top Layer w0.254: P2.2 -12.887,-5.787 -11.942,-5.787 ; v1(-9.961,-5.916) -11.116,-5.916 -11.148,-5.947 -11.781,-5.947 -11.942,-5.787 ; v1(-3.697,-2.014) -5.764,-2.014 -5.98,-2.23 -6.157,-2.23 -6.555,-2.628 ; v1(-0.777,4.145) 0.079,5 0.079,8.011 -0.07,8.16 -2.905,8.16 -3.253,7.812 -3.743,7.812 -3.816,7.739 v1(-3.828,7.739) -3.828,5.802 -5.287,4.342 -5.287,3.013 -7.51,0.79 -7.51,-1.657 -7.071,-2.095 -7.071,-2.111 -6.555,-2.628 ; -11.942,-5.787 -11.942,-3.266 -11.781,-3.106 -10.345,-3.106 -9.544,-3.906 -7.833,-3.906 -6.79,-2.863 -6.555,-2.628
  Bottom Layer w0.254: Q1.3 -4.889,9.16 -3.931,8.202 -3.928,8.202 -3.81,8.084 U2.3 U2.3@-3.81,7.751 ; RTC1.9 -4.387,-3.007 -4.387,-2.498 -3.912,-2.023 -3.706,-2.023 v1(-3.697,-2.014)
pads on no net: B1.4 B1.11 BUZZER.3 RTC1.3 RTC1.8 RTC1.10 RTC1.11 SW1.5 SW1.6 SW1.7 SW1.8 typec.3 typec.4 typec.9 typec.10 typec.13 typec.14 typec.15 typec.16 U1.5 U1.6 U1.7 U1.8 U1.13 U1.25 U1.26 U1.27 U1.30 U1.31 U1.32 U1.33 U1.34 U1.44 U1.45 U1.47 U1.48 U3.4
copper on no net:
  other v3: -11.33,-13.59 -11.33,13.59

## Polygon pours and split planes (outlines as drawn)
GND on Top Layer "GND_L01_P001" (solid, remove dead copper, pour order 1): -15.47,-16.904 -15.3,-16.734 16.2,-16.734 16.2,14.606 15.55,15.256 15.35,15.056 -15.83,15.056
GND on Bottom Layer "GND_L02_P000" (solid, remove dead copper, pour order 0): -16.276,-18.56 -16.106,-18.39 15.394,-18.39 15.394,12.95 15.04,15.4 -16.642,15.748

## Keep-outs
Keep-Out Layer:
  lines w0.1: -14.83,-11.848 -14.83,-0.365 -9.155,-0.365 -9.155,8.975 -14.795,8.975 ; -14.829,-11.841 ccw(c-14.194,-11.856) -14.209,-12.491 ; -14.829,8.975 -14.829,11.861 ; -14.83,11.89 cw(c-14.195,11.875) -14.18,12.51 ; -14.188,-12.49 -12.87,-12.49 ; -14.18,12.51 -12.857,12.51 ; -12.869,12.512 ccw(c-12.854,13.147) -12.219,13.132 ; -12.852,-12.492 cw(c-12.867,-13.127) -12.232,-13.142 ; -12.23,-13.89 -12.23,-13.13 ; -12.23,-13.859 ccw(c-11.595,-13.874) -11.61,-14.509 ; -12.22,13.147 -12.22,13.88 ; -12.22,13.89 cw(c-11.585,13.875) -11.57,14.51 ; -11.61,-14.51 11.58,-14.51 ; -11.59,14.51 11.59,14.51 ; 11.571,-14.512 ccw(c11.586,-13.877) 12.221,-13.892 ; 11.599,14.509 cw(c11.584,13.874) 12.219,13.859 ; 12.218,-13.098 cw(c12.853,-13.113) 12.868,-12.478 ; 12.22,-13.87 12.22,-13.114 ; 12.22,13.13 12.22,13.88 ; 12.221,13.158 ccw(c12.856,13.143) 12.841,12.508 ; 12.84,12.51 14.249,12.51 ; 12.854,-12.48 14.253,-12.48 ; 14.217,-12.478 ccw(c14.232,-11.843) 14.867,-11.858 ; 14.249,12.509 cw(c14.234,11.874) 14.869,11.859 ; 14.869,-11.865 14.869,11.891

## Other copper
Top Layer:
  pour cut-out: 14.819,-8.831 7.918,-8.831 7.918,8.659 14.819,8.659
Bottom Layer:
  pour cut-out: 14.824,-8.671 14.553,-8.671 7.924,-8.671 8.085,8.629 14.734,8.629

## Silkscreen, mask and mechanical layers (free items; w line width, h text height)
Top Overlay:
  lines w0.154: -13.35,-9.63 13.35,-9.63 13.35,9.63 -13.35,9.63 -13.35,-9.63
  text "2" at -0.244,10.882 h3
  text "1" at -2.613,10.809 h3
  text "Life" at -2.05,5.04 h0.6 r126.91
  text "XYWatch" at 5.586,0.996 h0.6 r319.93
  text "GND" at -10.742,-6.721 h0.6 r180
  text "3v3" at -10.742,-8.086 h0.6 r180
  text "SCL" at -10.742,-9.347 h0.6 r180
  text "SDA" at -10.742,-10.621 h0.6 r180
  text "v2" at -2.782,-12.79 h0.6
  text "XYWatch" at -9.69,-13.49 h0.6 r33.14
  text "Life" at 5.96,-13.49 h0.6 r38.22
  text "2025-5-13" at -2.798,-13.88 h0.6
Bottom Overlay:
  text "-" at -12.63,-3.95 h0.8
  text "+" at -11.963,-5.004 h0.8 r90
Bottom Paste:
  lines w0.1: -14.831,-14.488 14.87,-14.488 14.87,14.51 -14.831,14.51 -14.831,-14.488
  lines w0.254: -14.831,0.011 14.87,0.011 ; -0.002,-15.38 -0.002,14.518
Mechanical 1:
  lines w0.1: -14.832,-11.968 -14.829,-11.841 -14.83,-0.365 -9.155,-0.365 -9.155,8.975 -14.829,8.975 -14.829,11.861 -14.83,11.89 -14.827,12.016 -14.725,12.247 -14.542,12.422 -14.306,12.513 -14.18,12.51 -12.857,12.51 -12.744,12.521 -12.513,12.61 -12.334,12.782 -12.234,13.008 -12.219,13.132 -12.22,13.147 -12.22,13.89 -12.217,14.016 -12.115,14.247 -11.932,14.422 -11.696,14.513 -11.57,14.51 11.59,14.51 11.726,14.506 11.957,14.404 12.131,14.221 12.222,13.986 12.219,13.859 12.22,13.88 12.22,13.13 12.221,13.158 12.23,13.034 12.32,12.802 12.491,12.623 12.717,12.523 12.841,12.508 14.249,12.51 14.375,12.506 14.606,12.404 14.781,12.221 14.872,11.985 14.869,11.859 14.869,11.891 14.869,-11.865 14.864,-11.985 14.762,-12.216 14.579,-12.39 14.343,-12.481 14.217,-12.478 14.253,-12.48 12.854,-12.48 12.868,-12.478 12.744,-12.488 12.513,-12.577 12.333,-12.748 12.233,-12.975 12.218,-13.098 12.22,-13.114 12.22,-13.87 12.221,-13.892 12.218,-14.018 12.116,-14.249 11.933,-14.423 11.697,-14.515 11.571,-14.512 -11.61,-14.51 -11.737,-14.506 -11.968,-14.404 -12.142,-14.221 -12.233,-13.985 -12.23,-13.859 -12.23,-13.89 -12.23,-13.13 -12.241,-13.017 -12.331,-12.786 -12.502,-12.607 -12.728,-12.507 -12.852,-12.492 -12.87,-12.49 -14.209,-12.491 -14.336,-12.488 -14.567,-12.386 -14.741,-12.203 -14.832,-11.968

## Text inside footprints (layer, text, board x,y; h text height)
UD1: Bottom Overlay "30" at 11.859,-11.334 h0.8 r180